# Altium PCB Antenna_base_v3.PcbDoc (part 1 of 2)
Units mil, origin at the board's own origin, x right, y up, seen from the top; angles counter-clockwise.
Board outline 2245 x 2630 mil, 2 copper layers (Top Layer, Bottom Layer); 85 components, 87 nets, 365 pads, 73 vias.
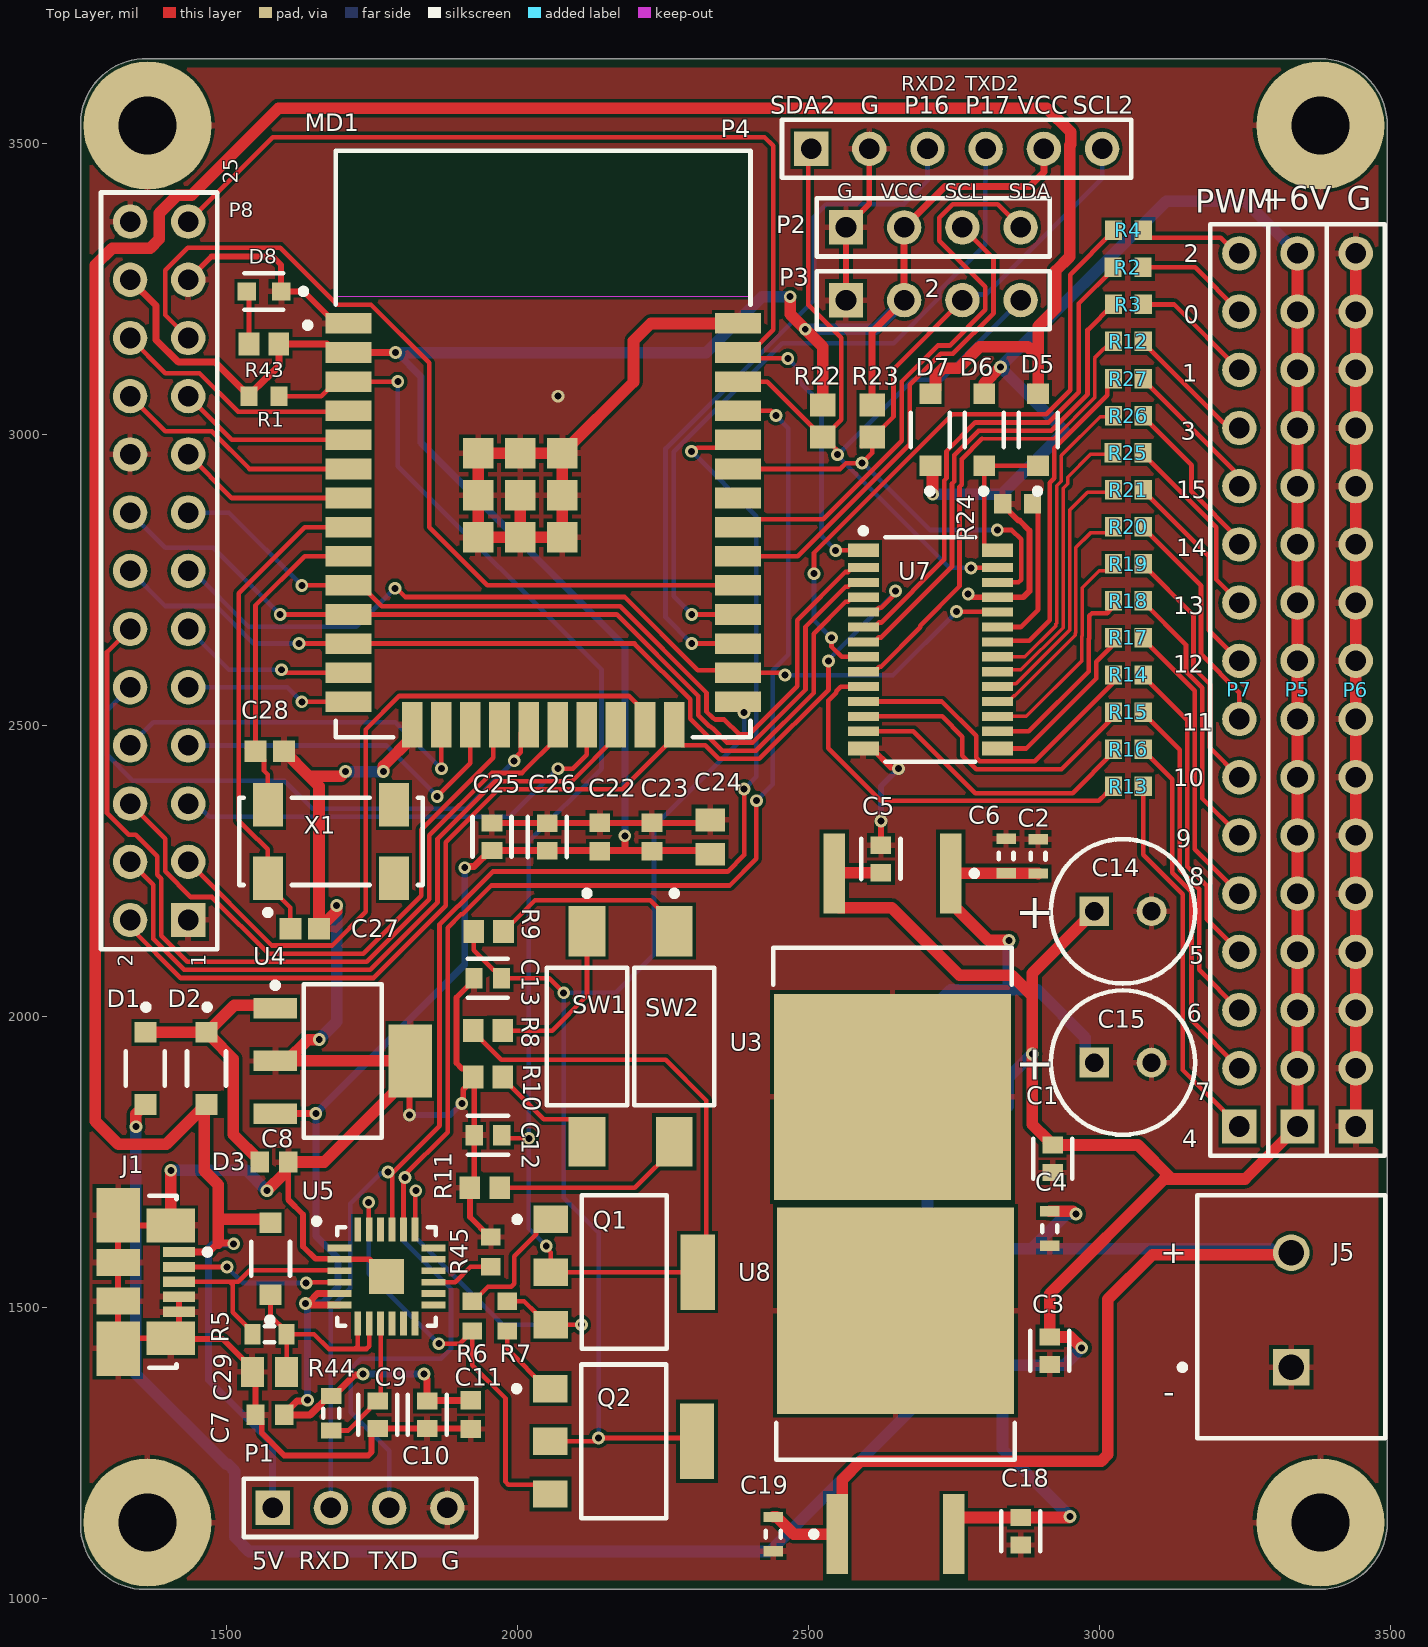
[diagram p0: Top Layer view]
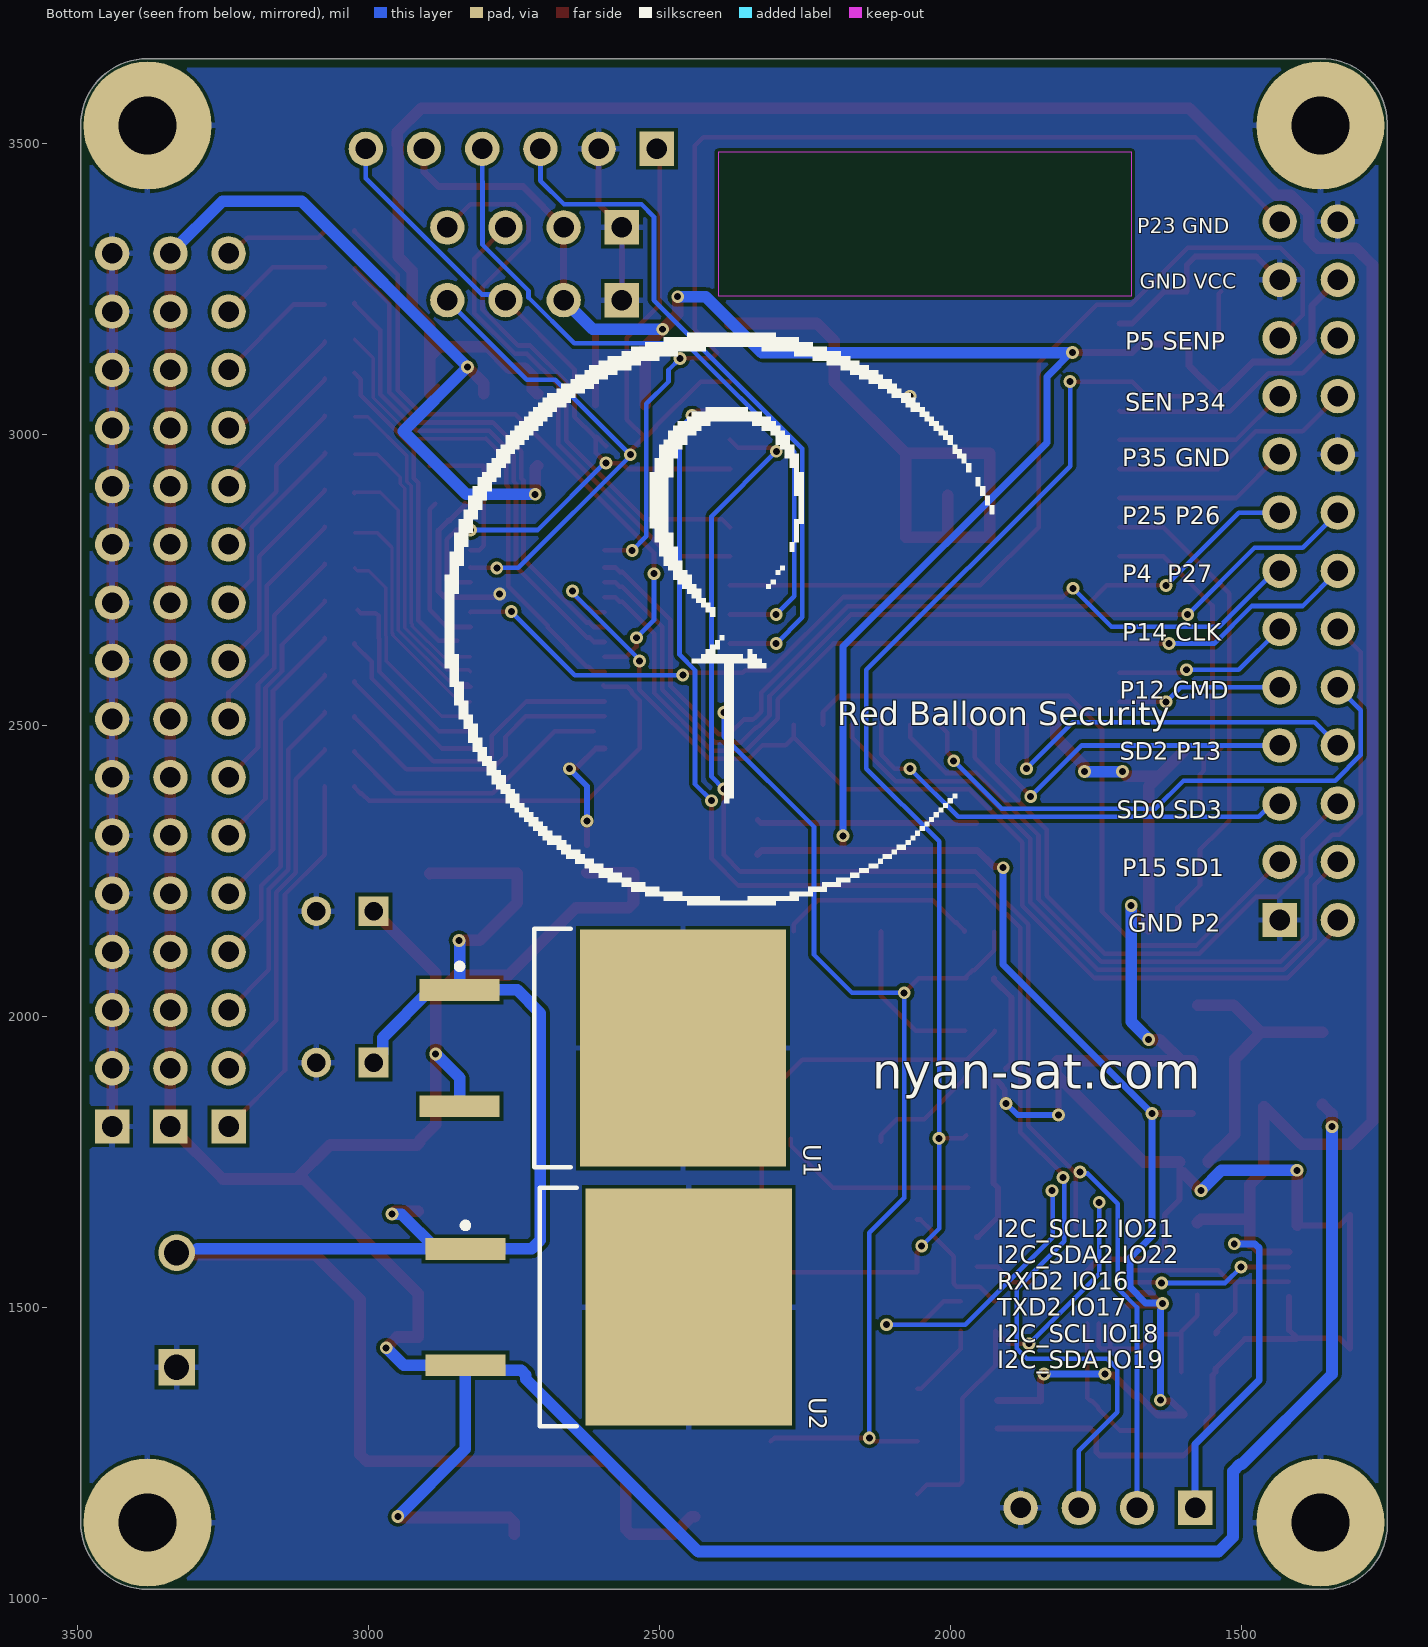
[diagram p1: Bottom Layer view, seen from below]
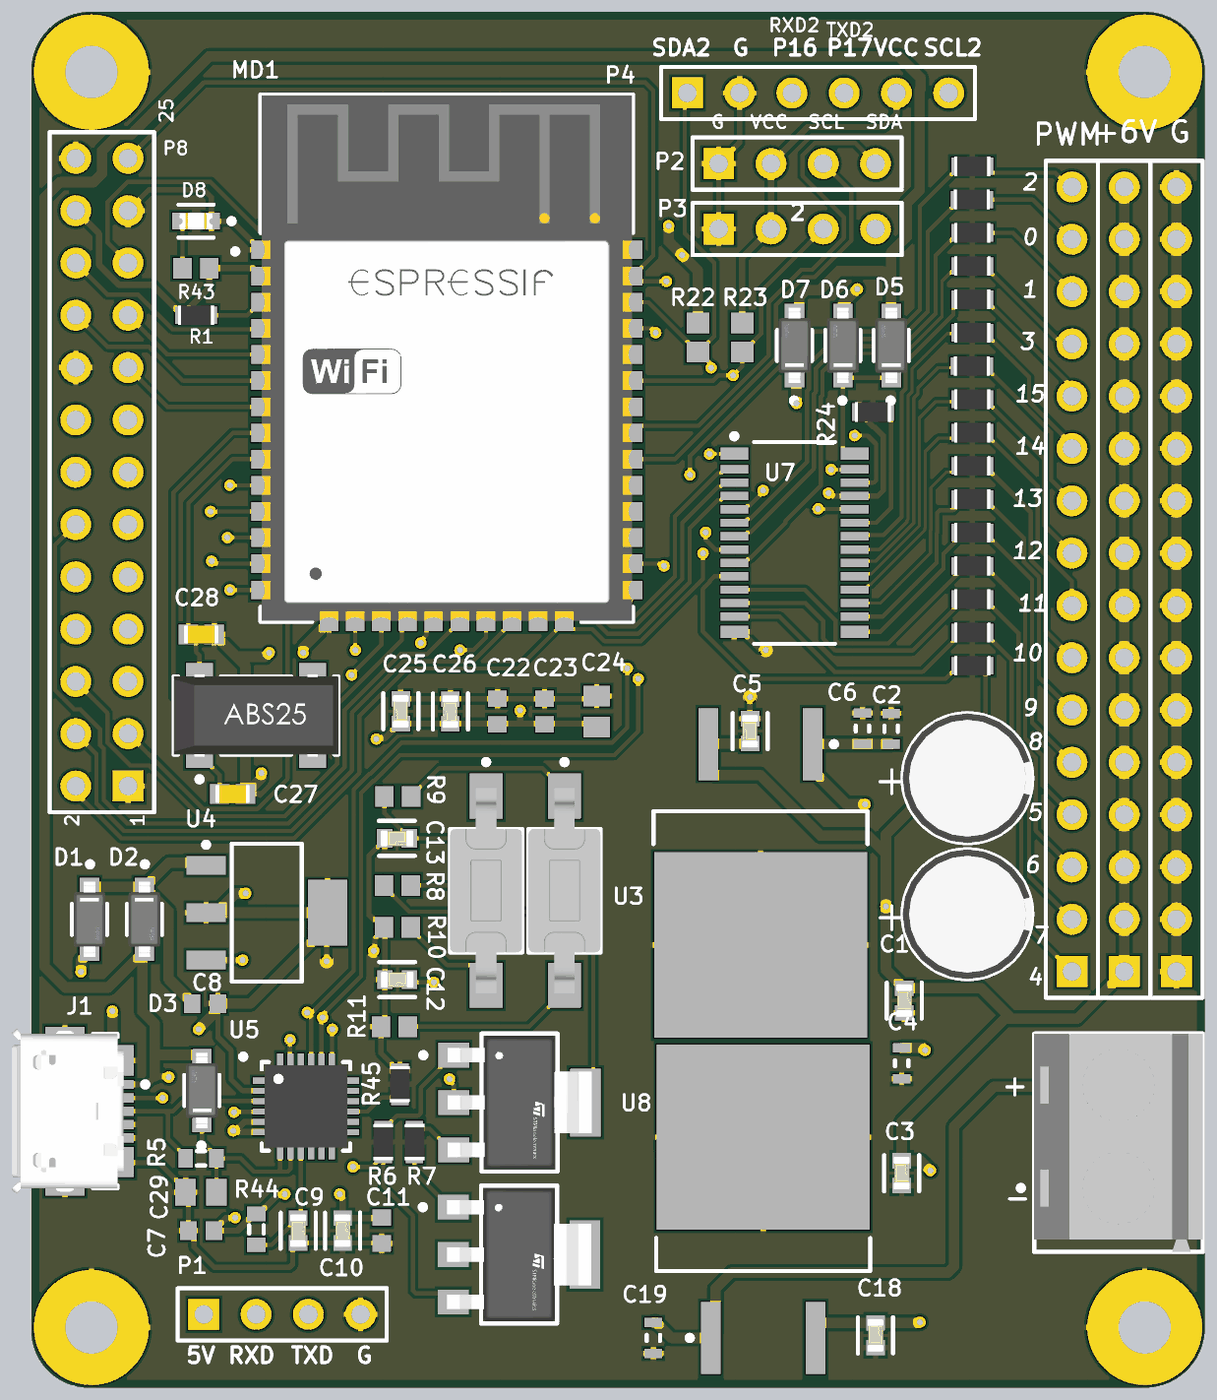
[diagram p3: 3D render of the assembled board from above, using the file's embedded part models]

## Layer stack, top to bottom
Top Solder: solder mask 0.4, Solder Resist, Dk 3.5
Top Layer: signal copper 1.4
Dielectric 1: dielectric 12.6, FR-4, Dk 4.8
Bottom Layer: signal copper 1.4
Bottom Solder: solder mask 0.4, Solder Resist, Dk 3.5

## Board outline
1250,1125 ccw(c1360,1125) 1360,1015 3380,1015 ccw(c3380,1130) 3495,1130 3495,3530 ccw(c3380,3530) 3380,3645 1365,3645 ccw(c1362.5,3532.5) 1250,3535

## Design rules (kind name [scope] priority, off if disabled: settings)
BoardOutlineClearance [All] p1: gap=15 ignorepadtopadclearanceinfootprint=FALSE
Clearance "Clearance Polygons" [InPolygon] p1: gap=6 ignorepadtopadclearanceinfootprint=FALSE except(0: Arc-Hole Track-Hole SMDPad-Hole THPad-Hole Via-Hole Fill-Hole Poly-Hole Region-Hole Text-Hole)
Clearance [All] p2: gap=5 ignorepadtopadclearanceinfootprint=FALSE except(0: Arc-Hole Track-Hole SMDPad-Hole THPad-Hole Via-Hole Fill-Hole Poly-Hole Region-Hole Text-Hole; 2: SMDPad-Via)
ComponentClearance "HM-TRP & UFL" [InComponent('X1') vs InComponent('U1')] p1: gap=0 collisioncheckmode=3 verticalgap=0 showdistances=FALSE
ComponentClearance [All] p2: gap=0 collisioncheckmode=3 verticalgap=0 showdistances=FALSE
DiffPairsRouting [All] p1: maxlimit=393.7 minlimit=5 mostfreqgap=8 toplayer_minwidth=5 toplayer_maxwidth=15 toplayer_prefwidth=8 bottomlayer_minwidth=5 bottomlayer_maxwidth=15 bottomlayer_prefwidth=8 maxuncoupledlength=500
HoleSize [All] p1: absolutevalues=TRUE maxlimit=265 minlimit=10 maxpercent=80.000 minpercent=20.000
HoleToHoleClearance [All] p1: gap=10 allowstackedmicrovias=FALSE
MinimumAnnularRing [All] p1: minimumring=4
MinimumSolderMaskSliver [All] p1: minsoldermaskwidth=0
PlaneClearance [All] p1: clearance=10
PlaneConnect [All] p1: planeconnectstyle=Relief reliefexpansion=4 reliefentries=4 reliefconductorwidth=6 reliefairgap=6
PolygonConnect "Via connect style" [isVia] p1: connectstyle=Direct reliefconductorwidth=10 reliefentries=4 polygonreliefangle="90 Angle" airgapwidth=10
PolygonConnect [All] p2: connectstyle=Relief reliefconductorwidth=10 reliefentries=4 polygonreliefangle="90 Angle" airgapwidth=6
RoutingCorners [All] p1: cornerstyle=45-Degree minsetback=49.21 maxsetback=49.21
RoutingVias [All] p1: holewidth=12 width=22 viastyle="Through Hole" minholewidth=10 minwidth=18 maxholewidth=100 maxwidth=114
SilkToSilkClearance [All] p1: silktosilkclearance=0
SilkToSolderMaskClearance [IsPad] p1: minsilkscreentomaskgap=5 clearancetoexposedcopper=TRUE
SolderMaskExpansion [All] p1: expansion=2.5 istentingtop=FALSE
Width GND [InNet('GND')] p1: maxlimit=30 minlimit=10 preferedwidth=20
Width Power [InNetClass('Power')] p2: maxlimit=40 minlimit=20 preferedwidth=30
Width 3V3 [InNetClass('3V3')] p3: maxlimit=30 minlimit=10 preferedwidth=20
Width [All] p4: maxlimit=400 minlimit=6 preferedwidth=8
20 further rules are at their usual default settings.

## Classes and differential pairs
component class 11_GPS_BREAKOUT: P4
component class 10_IMU_BREAKOUT: P2
component class 08_CoreBoard: C22 C23 C24 C25 C26 C27 C28 D8 MD1 P8 R1 R43 X1
component class 05_PWMdriver: D5 D6 D7 P3 P5 P6 P7 R2 R3 R4 R12 R13 R14 R15 R16 R17 R18 R19 R20 R21 R22 R23 R24 R25 R26 R27 U7
component class 03_pushswitch: C12 C13 Q1 Q2 R6 R7 R8 R9 R10 R11 SW1 SW2
component class 02_USB2UART: C7 C8 C9 C10 C11 C29 D1 D2 D3 J1 P1 R5 R44 R45 U4 U5
component class 01_powersupply: C1 C2 C3 C4 C5 C6 C14 C15 C18 C19 J5 U1 U2 U3 U8

## Components (designator, comment, footprint, x,y, rotation, side; value= is the part's Value field where it differs from the comment)
C1 "C0603_0.1UF" FP-C0603C-CF-MFG#1 2920,1755 r270 top value="0.10 μF"
C2 "C0603_0.33UF" CAPC1608X90X20LL10 2895,2274.53 r270 top value=0.33uF
C3 "C0603_0.1UF" FP-C0603C-CF-MFG#2 2915,1425 r270 top value="0.10 μF"
C4 "C0603_0.33UF" CAPC1608X90X20LL10 2915,1635 r90 top value=0.33uF
C5 "C0603_0.1UF" FP-C0603C-CF-MFG#1 2625,2270 r90 top value="0.10 μF"
C6 "C0603_0.33UF" CAPC1608X90X20LL10 2840,2275 r270 top value=0.33uF
C7 "C0603_1UF" CAPC1608X87X35LL15T15 1575,1315 r0 top value=1uF
C8 "C0603_1UF" CAPC1608X87X35LL15T15 1582.24,1749.21 r180 top value=1uF
C9 "C0603_0.1UF" FP-C0603C-CF-MFG#1 1760.47,1315.2 r270 top value="0.10 μF"
C10 "C0603_0.1UF" FP-C0603C-CF-MFG#2 1845.47,1315.2 r270 top value="0.10 μF"
C11 "C0603_1UF" CAPC1608X87X35LL15T15 1920.47,1315.2 r90 top value=1uF
C12 "C0603_0.1UF" FP-C0603C-CF-MFG#1 1950,1795 r180 top value="0.10 μF"
C13 "C0603_0.1UF" FP-C0603C-CF-MFG#1 1949.57,2065.04 r180 top value="0.10 μF"
C14 "ECA-2AM220" CAPPR55-250-1120X630X1220 3040.79,2180 r0 top
C15 "ECA-2AM220" CAPPR55-250-1120X630X1220 3040.79,1920 r0 top
C18 "C0603_0.1UF" FP-C0603C-CF-MFG#2 2865,1115 r270 top value="0.10 μF"
C19 "C0603_0.33UF" CAPC1608X90X20LL10 2440,1110 r90 top value=0.33uF
C22 "C0603_1UF" CAPC1608X87X35LL15T15 2141.73,2307.52 r270 top value=1uF
C23 "C0603_1UF" CAPC1608X87X35LL15T15 2231.73,2307.52 r270 top value=1uF
C24 "C0805_10UF" CAPC2013X135X50LL10T20 2331.73,2307.52 r270 top value=10uF
C25 "C0603_0.1UF" FP-C0603C-CF-MFG#1 1956.73,2308.11 r90 top value="0.10 μF"
C26 "C0603_0.1UF" FP-C0603C-CF-MFG#1 2051.73,2307.52 r90 top value="0.10 μF"
C27 "CC0603JRNPO9BN120" CAPC1608X90X40NL10T20 1635,2150 r180 top value=12pF
C28 "CC0603JRNPO9BN120" CAPC1608X90X40NL10T20 1575,2455 r180 top value=12pF
C29 "C0805_10UF" CAPC2013X135X50LL10T20 1574.57,1388.43 r0 top value=10uF
D1 "DIODE_1N5819" FP-SOD123-MFG 1361.3,1910.08 r270 top value=50pF
D2 "DIODE_1N5819" FP-SOD123-MFG 1466.3,1910.08 r270 top value=50pF
D3 "DIODE_1N5819" FP-SOD123-MFG 1576.3,1583.07 r90 top value=50pF
D5 "DIODE_1N5819" FP-SOD123-MFG 2895,3007.28 r90 top value=50pF
D6 "DIODE_1N5819" FP-SOD123-MFG 2802.5,3007.28 r90 top value=50pF
D7 "DIODE_1N5819" FP-SOD123-MFG 2710,3007.28 r90 top value=50pF
D8 "LED" FP-LTST-C190GKT-MFG 1565,3245 r180 top
J1 "47346-0001" MOLX-47346-0001-5_V 1322.24,1543.43 r270 top
J5 "282836-2" TECO-282836-2_V 3330,1495 r90 top
MD1 "ESP32-WROOM-32D" FP-ESP32-WROOM-32D-MFG 2044.65,2982.91 r0 top
P1 "Header 4" HDR1X4 1580,1155 r0 top
P2 "Header 4" HDR1X4 2565,3355 r0 top
P3 "Header 4" HDR1X4 2565,3230 r0 top
P4 "Header 6" HDR1X6 2505,3490 r0 top
P5 "Header 16" HDR1X16 3340.79,1810.35 r90 top
P6 "Header 16" HDR1X16 3440.79,1810.35 r90 top
P7 "Header 16" HDR1X16 3240.79,1810.35 r90 top
P8 "Header 13X2" HDR2X13 1435,2165 r90 top
Q1 "BCP56-16" FP-SOT-223-P008-MFG#1 2184.02,1560 r0 top
Q2 "BCP56-16" FP-SOT-223-P008-MFG#2 2183.03,1269.45 r0 top
R1 "R0603_10K" RESC1609X55X30LL15T15 1565,3065 r0 top value=10k
R2 "R0603_10K" RESC1609X55X30LL15T15 3049.41,3286.33 r0 top value=10k
R3 "R0603_10K" RESC1609X55X30LL15T15 3050,3222.67 r0 top value=10k
R4 "R0603_10K" RESC1609X55X30LL15T15 3050,3350 r0 top value=10k
R5 "R0603_4.7K" J1-0603 1574.57,1453.43 r180 top value=4.7K
R6 "R0603_10K" RESC1609X55X30LL15T15 1923.03,1484.45 r90 top value=10k
R7 "R0603_10K" RESC1609X55X30LL15T15 1983.03,1484.45 r270 top value=10k
R8 "R0603_120R" RESC1608X55X30NL20T20 1950,1975 r180 top value=120ohm
R9 "R0603_120R" RESC1608X55X30NL20T20 1950.94,2145.04 r180 top value=120ohm
R10 "R0603_120R" RESC1608X55X30NL20T20 1950,1895 r0 top value=120ohm
R11 "R0603_120R" RESC1608X55X30NL20T20 1944.41,1705 r0 top value=120ohm
R12 "R0603_10K" RESC1609X55X30LL15T15 3050,3159 r0 top value=10k
R13 "R0603_10K" RESC1609X55X30LL15T15 3050,2395 r0 top value=10k
R14 "R0603_10K" RESC1609X55X30LL15T15 3050,2586 r0 top value=10k
R15 "R0603_10K" RESC1609X55X30LL15T15 3050,2522.33 r0 top value=10k
R16 "R0603_10K" RESC1609X55X30LL15T15 3050,2458.67 r0 top value=10k
R17 "R0603_10K" RESC1609X55X30LL15T15 3050,2649.67 r0 top value=10k
R18 "R0603_10K" RESC1609X55X30LL15T15 3050,2713.33 r0 top value=10k
R19 "R0603_10K" RESC1609X55X30LL15T15 3050,2777 r0 top value=10k
R20 "R0603_10K" RESC1609X55X30LL15T15 3050,2840.67 r0 top value=10k
R21 "R0603_10K" RESC1609X55X30LL15T15 3050,2904.33 r0 top value=10k
R22 "R0603_2.4K" RESC1608X50X30ML20T20 2525,3022.56 r90 top value=2.4kR
R23 "R0603_2.4K" RESC1608X50X30ML20T20 2610,3022.56 r90 top value=2.4kR
R24 "R0603_10K" RESC1609X55X30LL15T15 2860,2880 r180 top value=10k
R25 "R0603_10K" RESC1609X55X30LL15T15 3049.41,2968 r0 top value=10k
R26 "R0603_10K" RESC1609X55X30LL15T15 3050,3031.67 r0 top value=10k
R27 "R0603_10K" RESC1609X55X30LL15T15 3050,3095.33 r0 top value=10k
R43 "R0603_120R" RESC1608X55X30NL20T20 1565,3155 r180 top value=120ohm
R44 "R0603_4.7K" J1-0603 1680.47,1317.48 r90 top value=4.7K
R45 "R0603_10K" RESC1609X55X30LL15T15 1955,1595 r90 top value=10k
SW1 "push_button" TECO-FSMSMTR_V 2120,1965 r270 top
SW2 "push_button" TECO-FSMSMTR_V 2270,1965 r270 top
U1 "L7806CD2T-TR" TO-263_L 2597.8,1945 r180 bottom
U2 "L7806CD2T-TR" TO-263_L 2587.8,1500 r180 bottom
U3 "L7806CD2T-TR" TO-263_L 2645,1998.94 r270 top
U4 "MCP1826S-3302E/DB" SOT-223-DB3_L 1700.47,1922.95 r0 top
U5 "CP2102N-A01-GQFN24" SLAB-QFN-24-2550x2550TP_A_V 1775.34,1552.64 r0 top
U7 "PCA9685PW" SOT361-1_V 2710,2630 r0 top
U8 "L7806CD2T-TR" TO-263_L 2650,1356.06 r90 top
X1 "ABS25-32.768KHZ-1-T" ABRA-ABS25-4_V 1680,2300 r0 top

## Footprints (in the part's own frame and the unit in brackets; to place one, negate y for a bottom-side part, rotate by r counter-clockwise, add the part's x,y. Pads: shape width x height; smd on the part's side, far side on the other; paste and mask are expansions set on the pad)
ABRA-ABS25-4_V [mm] "SMD, 4-Leads, Body 8x3.8mm, Pitch 5.5mm, Height 2.5mm"
  rect 1.3x1.9 smd: 1(-2.75,-1.6) 2(2.75,-1.6) 3(2.75,1.6) 4(-2.75,1.6)
  silkscreen extent -4,-3.22 4,1.9, body extent -4,-2 4,2, height 2.66
CAPC1608X87X35LL15T15 [mm] "Chip Capacitor, 2-Leads, Body 1.60x0.80mm, IPC High Density"
  rect 0.8x0.9 smd: 1(-0.625,0) 2(0.625,0)
  body extent -0.87,-0.48 0.87,0.48, height 0.87
CAPC1608X90X20LL10 [mm] "Chip Capacitor, 2-Leads, Body 1.70x0.90mm, IPC High Density"
  rect 0.45x0.85 smd: 1(-0.75,0) 2(0.75,0)
  silkscreen extent -0.15,-0.33 0.15,0.33, body extent -0.85,-0.45 0.85,0.45, height 0.9
CAPC1608X90X40NL10T20 [mm] "Chip Capacitor, 2-Leads, Body 1.7x0.9mm, IPC Medium Density"
  rect 0.95x0.95 smd: 1(-0.625,0) 2(0.625,0)
  body extent -0.85,-0.45 0.85,0.45, height 0.9
CAPC2013X135X50LL10T20 [mm] "Chip Capacitor, 2-Leads, Body 2.00x1.25mm, IPC High Density"
  rect 1x1.3 smd: 1(-0.75,0) 2(0.75,0)
  body extent -1.05,-0.67 1.05,0.68, height 1.35
CAPPR55-250-1120X630X1220 [mm] "THD, 2-Leads, Dia 6.3mm, Body Length 11.2mm"
  rect 1.3x1.3 hole 0.8: 1(-1.25,0)
  round 1.3 hole 0.8: 2(1.25,0)
  silkscreen extent -3.15,-3.15 3.15,3.15, body extent -3.15,-3.15 3.16,3.15, height 12.21
FP-C0603C-CF-MFG#1 [mm]
  rect 0.75x0.9 smd: 1(-0.6,0) 2(0.6,0)
  silkscreen extent -0.87,-0.85 0.88,0.85, body extent -0.8,-0.4 0.8,0.4, height 0.87
FP-C0603C-CF-MFG#2 [mm]
  rect 0.75x0.9 smd paste+0 mask+0: 1(-0.6,0) 2(0.6,0)
  silkscreen extent -0.87,-0.85 0.88,0.85, body extent -0.8,-0.4 0.8,0.4, height 0.87
FP-ESP32-WROOM-32D-MFG [mm]
  rect 2x0.9 smd: 1(-8.5,5.26) 2(-8.5,3.99) 3(-8.5,2.72) 4(-8.5,1.45) 5(-8.5,0.18) 6(-8.5,-1.09) 7(-8.5,-2.36) 8(-8.5,-3.63) 9(-8.5,-4.9) 10(-8.5,-6.17) 11(-8.5,-7.44) 12(-8.5,-8.71) 13(-8.5,-9.98) 14(-8.5,-11.25) 25(8.5,-11.25) 26(8.5,-9.98) 27(8.5,-8.71) 28(8.5,-7.44) 29(8.5,-6.17) 30(8.5,-4.9) 31(8.5,-3.63) 32(8.5,-2.36) 33(8.5,-1.09) 34(8.5,0.18) 35(8.5,1.45) 36(8.5,2.72) 37(8.5,3.99) 38(8.5,5.26)
  rect 0.9x2 smd: 15(-5.715,-12.25) 16(-4.445,-12.25) 17(-3.175,-12.25) 18(-1.905,-12.25) 19(-0.635,-12.25) 20(0.635,-12.25) 21(1.905,-12.25) 22(3.175,-12.25) 23(4.445,-12.25) 24(5.715,-12.25)
  rect 1.33x1.33 smd: 39(-2.835,-4.075) 39(-2.835,-2.24) 39(-2.835,-0.405) 39(-1,-4.075) 39(-1,-2.24) 39(-1,-0.405) 39(0.835,-4.075) 39(0.835,-2.24) 39(0.835,-0.405)
  Keep-Out Layer region: -9,6.45 9,6.45 9,12.75 -9,12.75
  Keep-Out Layer region: -9,6.45 9,6.45 9,12.75 -9,12.75
  silkscreen extent -10.4,-12.8 9.05,12.8, body extent -9.6,-13.35 9.6,12.9, height 0.25
FP-LTST-C190GKT-MFG [mm]
  rect 0.8x0.8 smd: 1(-0.75,0) 2(0.75,0)
  silkscreen extent -1.85,-0.8 0.85,0.8, body extent -1.25,-0.55 1.25,0.55, height 0.25
FP-SOD123-MFG [mm]
  rect 0.9x0.95 smd: 1(-1.575,0) 2(1.575,0)
  silkscreen extent -2.8,-0.85 0.75,0.85, body extent -2.12,-0.95 2.12,0.95, height 0.25
FP-SOT-223-P008-MFG#1 [mm]
  rect 1.5x1.2 smd: 1(-3.2,2.3) 2(-3.2,0) 3(-3.2,-2.3)
  rect 1.5x3.3 smd: 2(3.2,0)
  silkscreen extent -4.8,-3.35 1.85,3.35, body extent -4.05,-3.45 4.05,3.45, height 0.25
FP-SOT-223-P008-MFG#2 [mm]
  rect 1.5x1.2 smd paste+0 mask+0: 1(-3.2,2.3) 2(-3.2,0) 3(-3.2,-2.3)
  rect 1.5x3.3 smd paste+0 mask+0: 2(3.2,0)
  silkscreen extent -4.8,-3.35 1.85,3.35, body extent -4.05,-3.45 4.05,3.45, height 0.25
HDR1X4 [mm] "Connector; Header; 4 Position"
  rect 1.5x1.5 hole 0.9: 1(0,0)
  round 1.5 hole 0.9: 2(2.54,0) 3(5.08,0) 4(7.62,0)
  silkscreen extent -1.27,-1.27 8.89,1.27
HDR1X6 [mm] "Connector; Header; 6 Position"
  rect 1.5x1.5 hole 0.9: 1(0,0)
  round 1.5 hole 0.9: 2(2.54,0) 3(5.08,0) 4(7.62,0) 5(10.16,0) 6(12.7,0)
  silkscreen extent -1.27,-1.27 13.97,1.27
HDR1X16 [mm] "Connector; Header; 16 Position"
  rect 1.5x1.5 hole 0.9: 1(0,0)
  round 1.5 hole 0.9: 2(2.54,0) 3(5.08,0) 4(7.62,0) 5(10.16,0) 6(12.7,0) 7(15.24,0) 8(17.78,0) 9(20.32,0) 10(22.86,0) 11(25.4,0) 12(27.94,0) 13(30.48,0) 14(33.02,0) 15(35.56,0) 16(38.1,0)
  silkscreen extent -1.27,-1.27 39.37,1.27
HDR2X13 [mm] "Connector; Header; 13x2 Position"
  rect 1.5x1.5 hole 0.9: 1(0,0)
  round 1.5 hole 0.9: 2(0,2.54) 3(2.54,0) 4(2.54,2.54) 5(5.08,0) 6(5.08,2.54) 7(7.62,0) 8(7.62,2.54) 9(10.16,0) 10(10.16,2.54) 11(12.7,0) 12(12.7,2.54) 13(15.24,0) 14(15.24,2.54) 15(17.78,0) 16(17.78,2.54) 17(20.32,0) 18(20.32,2.54) 19(22.86,0) 20(22.86,2.54) 21(25.4,0) 22(25.4,2.54) 23(27.94,0) 24(27.94,2.54) 25(30.48,0) 26(30.48,2.54)
  silkscreen extent -1.27,-1.27 31.75,3.81
J1-0603 [mm] "Chip Resistor, Body 1.6x0.8mm, IPC High Density"
  rect 0.7x0.9 smd: 1(-0.75,0) 2(0.75,0)
  silkscreen extent -0.2,-0.35 0.2,0.35, body extent -0.85,-0.48 0.85,0.48, height 0.9
MOLX-47346-0001-5_V [mm] "SMD, 5-Leads, Body 7.5x5mm, Pitch 0.65mm"
  rect 0.45x1.38 smd: 1(-1.3,2.46) 2(-0.65,2.46) 3(0,2.46) 4(0.65,2.46) 5(1.3,2.46)
  rect 1.475x2.1 smd: 6(-2.462,2.1) 7(2.462,2.1)
  rect 2.375x1.9 smd: 8(-2.913,-0.2) 11(2.913,-0.2)
  rect 1.175x1.9 smd: 9(-0.837,-0.2) 10(0.837,-0.2)
  silkscreen extent -3.75,1.16 3.75,3.83, body extent -3.99,-2.78 3.99,2.65, height 2.69
RESC1608X50X30ML20T20 [mm] "Chip Resistor, 2-Leads, Body 1.60x0.80mm, IPC Low Density"
  rect 1x1.1 smd: 1(-0.7,0) 2(0.7,0)
  body extent -0.9,-0.5 0.9,0.5, height 0.5
RESC1608X55X30NL20T20 [mm] "Chip Resistor, 2-Leads, Body 1.60x0.80mm, IPC Medium Density"
  rect 0.9x1 smd: 1(-0.65,0) 2(0.65,0)
  body extent -0.9,-0.5 0.9,0.5, height 0.55
RESC1609X55X30LL15T15 [mm] "Chip Resistor, 2-Leads, Body 1.75x0.95mm, IPC High Density"
  rect 0.75x0.85 smd: 1(-0.65,0) 2(0.65,0)
  body extent -0.87,-0.48 0.87,0.48, height 0.55
SLAB-QFN-24-2550x2550TP_A_V [mm] "QFN, 6-Leads, Body 4x4mm, Pitch 0.5mm, Thermal Pad 2.55x2.55mm"
  rect 1.053x0.3 smd: 1(-2.052,1.25) 2(-2.052,0.75) 3(-2.052,0.25) 4(-2.052,-0.25) 5(-2.052,-0.75) 6(-2.052,-1.25) 13(2.052,-1.25) 14(2.052,-0.75) 15(2.052,-0.25) 16(2.052,0.25) 17(2.052,0.75) 18(2.052,1.25)
  rect 0.3x1.053 smd: 7(-1.25,-2.052) 8(-0.75,-2.052) 9(-0.25,-2.052) 10(0.25,-2.052) 11(0.75,-2.052) 12(1.25,-2.052) 19(1.25,2.052) 20(0.75,2.052) 21(0.25,2.052) 22(-0.25,2.052) 23(-0.75,2.052) 24(-1.25,2.052)
  rect 1.524x1.524 smd: 25(0,0)
  silkscreen extent -3.17,-2.15 2.15,2.54, body extent -2,-2 2,2, height 0.8
SOT361-1_V [mm] "SOP, 28-Leads, Body 9.7x4.4mm, Pitch 0.65mm, NXP Recommended"
  rect 1.35x0.6 smd: 1(-2.925,4.325) 14(-2.925,-4.325) 15(2.925,-4.325) 28(2.925,4.325)
  rect 1.35x0.4 smd: 2(-2.925,3.575) 3(-2.925,2.925) 4(-2.925,2.275) 5(-2.925,1.625) 6(-2.925,0.975) 7(-2.925,0.325) 8(-2.925,-0.325) 9(-2.925,-0.975) 10(-2.925,-1.625) 11(-2.925,-2.275) 12(-2.925,-2.925) 13(-2.925,-3.575) 16(2.925,-3.575) 17(2.925,-2.925) 18(2.925,-2.275) 19(2.925,-1.625) 20(2.925,-0.975) 21(2.925,-0.325) 22(2.925,0.325) 23(2.925,0.975) 24(2.925,1.625) 25(2.925,2.275) 26(2.925,2.925) 27(2.925,3.575)
  silkscreen extent -3.05,-4.9 1.96,5.3, body extent -2.2,-4.85 2.2,4.85, height 1.1
SOT-223-DB3_L [mm] "SOT223, 4-Leads, Body 6.5x3.5mm, Pitch 2.3mm, Lead Span 7mm, IPC High Density"
  rect 1.9x0.9 smd: 1(-2.95,2.3) 2(-2.95,0) 3(-2.95,-2.3)
  rect 1.9x3.2 smd: 4(2.95,0)
  silkscreen extent -3.07,-3.35 1.7,3.42, body extent -1.85,-3.35 1.85,3.35, height 1.8
TECO-282836-2_V [mm] "Female Header, Pitch 5mm, 1 x 2 Position, Height 10mm"
  rect 1.6x1.6 hole 1.1: 1(-2.5,0)
  round 1.6 hole 1.1: 2(2.5,0)
  silkscreen extent -5.6,-4.1 5,4.87, body extent -5.6,-4.1 5,4.1, height 10
TECO-FSMSMTR_V [mm] "SMD, 2-Leads, Body 6x3.5mm, Pitch 9.19mm"
  rect 2.2x1.6 smd: 1(-4.595,0)
  rect 2.18x1.6 smd: 2(4.595,0)
  silkscreen extent -6.37,-1.75 3,1.75, body extent -4.98,-1.75 4.98,1.75, height 4.4
TO-263_L [mm] "D2-PAK, 4-Leads, Body 9.2x10.2mm, Pitch 2.54mm, Lead Span 15.4mm, IPC High Density"
  rect 3.5x0.95 smd: 1(-6.25,2.54) 3(-6.25,-2.54)
  rect 9x10.35 smd: 4(3.5,0)
  silkscreen extent -6.38,-5.2 -1.4,5.2, body extent -3,-5.2 6.35,5.2, height 4.6

## Part data
C1 C3 C5 C9 C10 C12 C13 C18 C25 C26: library part CMP-03020-016578-1, "CAP CER 0.1UF 16V X7R 0603", Capacitance="0.10 μF", Manufacturer=KEMET, Manufacturer Part Number=C0603C104M4RAC7411, Package=C0603C-CF, Temperature="-55°C to +125°C", Temperature Characteristic=X7R, Temperature Coefficient=30ppm/°C, Temperature Range High=+125°C, Temperature Range Low=-55°C, Tolerance=0.2, Voltage Rating="16 V", Automotive=Yes, Automotive Grade="Grade 1", Category=Cap, ComponentLink2Description=Datasheet, ComponentLink2URL=https://api.kemet.com/component-edge/download/datasheet/C0603C100J5GACAUTO.pdf, Device Class L1="Passive Components", Device Class L2=Capacitors, Device Class L3="Ceramic Capacitors", Digikey Description="CAP CER 0.1UF 16V X7R 0603", Height=0.87mm, Lead Free=Yes, Material=Ceramic, Mouser Description="Multilayer Ceramic Capacitors MLCC - SMD/SMT 16volts 0.1uF X7R 20%", Octopart=https://octopart.com/c0603c104m4rac7411-kemet-9138805, RoHS=TRUE
C2 C4 C6 C19: library part CMP-2000-07551-1, "Chip Capacitor, 0.33 uF, +/- 10%, 50 V, -55 to 125 degC, 0603 (1608 Metric), RoHS, Tape and Reel", Manufacturer=TDK, Package Description="2-Pin Surface Mount Device, Body 1.6 x 0.8 mm", Package Reference=603, Datasheet URL=https://product.tdk.com/info/en/catalog/datasheets/mlcc_commercial_general_en.pdf, Datasheet Version=07/2017, Manufacturer URL=http://www.tdk.com/, Mounting Technology=SurfaceMount
C7 C8 C11 C22 C23: library part CMP-2006-03318-1, Manufacturer=Kemet, Part Number=C0603C101J1GACTU
C14 C15: library part CMP-1665-00035-2, "Aluminum Electrolytic Capacitor, 22 uF, +/- 20%, 100 V, -40 to 85 degC, 2-Pin THD, RoHS, Bulk", Case Code (Imperial)=0603, Case Code (Metric)=1608, Colour=Orange, Forward Current="20 mA", Forward Voltage="2.1 V", Max Operating Temperature="85 degC", Min Operating Temperature="-55 degC", Package Quantity=3000, Case\Package=0603, ComponentLink1Description="Manufacturer URL", ComponentLink1URL=http://www.panasonic.com/, ComponentLink2Description=Datasheet, ComponentLink2URL=https://industrial.panasonic.com/cdbs/www-data/pdf/RDF0000/ABA0000C1047.pdf, DatasheetVersion=Mar-16, Height="1.1 mm", Illumination Colour=Orange, Length="1.6 mm", Lens Style=Clear, Luminous Intensity="2 mcd", Mount="Surface Mount", Nominal Vf="2.1 V", PackageDescription="2-Pin Through Hole Device, Dia 6.3 mm, Body Length 11.2 mm", PackageReference=Radial, Packaging="Tape and Reel", Pins=2, Radiation Hardening=No, RoHSCompliant=true, Viewing Angle="130 degrees", Width="0.8 mm"
C24 C29: library part CMP-2007-03453-1, Manufacturer=Murata, Package=0805, Part Number=GRM21BR61C106KE15L
C27 C28: library part CMP-1659-00031-1, "Chip Capacitor, 12 pF, +/- 5%, 50 V, -55 to 125 degC, 0603 (1608 Metric), RoHS, Tape and Reel", Case\Package=Axial, Max Operating Temperature="155 degC", Min Operating Temperature="-55 degC", Package Quantity=200, Power Rating="250 mW", Resistance="475 kohm", Tolerance=1%, Voltage Rating="250 V", ComponentLink1Description="Manufacturer URL", ComponentLink1URL=http://www.yageo.com/, ComponentLink2Description=Datasheet, ComponentLink2URL=http://www.yageo.com/NewPortal/yageodocoutput?fileName=/pdf/MLCC/UPY-GP_NP0_16V-to-50V_14.pdf, DatasheetVersion="Rev. 14, 07/2016", Length="0.248 inch", Mount="Through Hole", PackageDescription="2-Pin Surface Mount Device, Body 1.6 x 0.8 mm", PackageReference=0603, Packaging=Bulk, RoHSCompliant=true
D1 D2 D3 D5 D6 D7: library part CMP-12790-000018-1, "DIODE SCHOTTKY 40V 1A SOD123", Capacitance=50pF, Forward Current=1A, Manufacturer="Diodes Inc", Manufacturer Part Number=1N5819HW-7-F, Max Junction Temp=+125°C, Max Repetitive Reverse Voltage=40V, Max Surge Forward Current=25A, Package=SOD123, Peak Reverse Current=1mA, Temperature="-65°C to +125°C", Temperature Range Low=-65°C, Terminal Temperature Tt Degc=90, Automotive=No, Category=Diode, Ciiva Ids=815630, ComponentLink2Description=Datasheet, ComponentLink2URL=https://www.diodes.com/assets/Datasheets/ds30217.pdf, Device Class L1="Discrete Semiconductors", Device Class L2=Diodes, Device Class L3="Schottky Diodes", Digikey Description="DIODE SCHOTTKY 40V 1A SOD123", Footprint Url=https://www.diodes.com/assets/Package-Files/SOD123.pdf, Height=1.45mm, If A=1, Import Ts=1521843113, Ipc Land Pattern Name=SOD365155X123-2, Lead Free=Yes, Mouser Description="1N5819HW Series 40 V 1 A Surface Mount Schottky Barrier Rectifier - SOD-123", Octopart=https://octopart.com/1n5819hw-7-f-diodes+inc.-323197, Release Date=1385348939, Reverse Voltage=40V, RoHS=TRUE, Standoff Height=0mm, Temperature Range High=+125°C, Vr V=40
D8: library part CMP-22017-000005-1, "LED GREEN CLEAR CHIP SMD", Case Code (Imperial)=0603, Case Code (Metric)=1608, Color=Green, Forward Current=30mA, Forward Voltage=2.1V, Lens Color=Colorless, Max Operating Temperature=85°C, Min Operating Temperature=-55°C, Package Quantity=1, Power Dissipation=100mW, Reverse Voltage=5V, Test Current=10mA, Voltage=2V, Case/Package=0603, Depth=0.8mm, Dominant Wavelength=569nm, Height=0.8mm, Illumination Color=Green, Lead Free="Lead Free", Length=1.6mm, Lens Style=Clear, Lens Transparency=Clear, Luminous Intensity=6mcd, Mount="Surface Mount", Number of Elements=1, Number of LEDs=1, Number of Pins=2, Packaging="Tape and Reel", Power Rating=100mW, Radiation Hardening=No, Viewing Angle=130°, Wavelength=565nm, Width=0.8mm
J1: library part CMP-2000-05246-1, "Micro-USB B Receptacle with Flange, -30 to 85 degC, 5-Pin SMD, RoHS, Tape and Reel", Color=Black, Manufacturer=Molex, Maximum Current Rating=1.8/ContactA, Maximum Voltage Rating=30VAC, Operating Temperature=-30to85C, Body Orientation=RightAngle, Contact Material=CopperAlloy, Contact Plating=GoldOverPalladiumNickelOverNickel, Datasheet URL=https://datasheet.ciiva.com/30075/304740473460001-io-nectors-30075527.pdf, Datasheet Version=Dec-13, Dimension=7.8x5.43x2.94mm, Gender=RCP, Housing Material=LiquidCrystalPolymer, Manufacturer URL=http://www.molex.com/, Mounting=SurfaceMount, Number of Contacts=5, Number of Ports=1, Number of Terminals=5, Packaging=EmbossedTapeandReel, Part No=47346-0001, Pitch=0.65mm, RoHS=Yes, Termination Method=Solder, Type=MicroUSBTypeB
J5: library part CMP-1684-00017-1, "Female Header, Pitch 5 mm, 1 x 2 Position, Height 10 mm, Tail Length 3.5 mm, Rohs, Bulk", Color=Green, Current=13.5A, Manufacturer="TE Connectivity", Package Description="Female Header, Pitch 5 mm, 1 x 2 Position, Height 10 mm, Tail Length 3.5 mm", Package Reference=THD, Standard Package=300, Voltage=300V, 3D Model=282836-2.pdf, Category=Connectors,Interconnects, Clamp Material - Plating=Brass-NickelPlated, Contact Material - Plating=Brass-TinPlated, Datasheet URL=http://www.te.com.cn/commerce/DocumentDelivery/DDEController?Action=showdoc&DocId=Catalog+Section%7F1308389_EUROSTYLE_TERMINAL_BLOCKS%7F0607%7Fpdf%7FEnglish%7FENG_CS_1308389_EUROSTYLE_TERMINAL_BLOCKS_0607.pdf%7F282836-2, Dynamic Catalog=BuchananSeries, Family=TerminalBlocks-WiretoBoard, Featured Product=EurostyleTerminalBlockConnectors, Features=Interlocking(Side), Housing Material=Polyamide(PA66),Nylon6/6, Manufacturer URL=http://www.te.com, Mating Orientation=HorizontalwithBoard, Mounting Type=ThroughHole, Number of Levels=1, Other Names="5ULV-02B / A98076", Packaging=Bulk, Pitch="0.197\"(5.00mm)", Positions Per Level=2, Product Training Modules=Wire-to-BoardEurostyleTerminalBlocks, RoHS Information=282836-2StatementofCompliance, Screw Material - Plating=Brass-NickelPlated, Screw Thread=M3, Series=Buchanan, Torque - Screw=0.68Nm(6Lb-In), Wire Gauge=16-30AWG, Wire Termination=Screw-RisingCageClamp
MD1: library part CMP-194065-000003-1, "WIFI MODULE 32MBITS SPI FLASH", Manufacturer="Espressif Systems", Max Frequency=2484MHz, Max Supply Voltage=3.6V, Min Supply Voltage=3V, Nominal Supply Current=500mA, Temperature="-40°C to +85°C", Temperature Range High=+85°C, Temperature Range Low=-40°C, Automotive=No, Bandwidth=72MHz, Category=UNK, ComponentLink2Description=Datasheet, ComponentLink2URL=https://www.espressif.com/sites/default/files/documentation/esp32-wroom-32d_esp32-wroom-32u_datasheet_en.pdf, Data Rate=150Mbits/s, Device Class L1="Integrated Circuits (ICs)", Device Class L2="RF Semiconductors and Devices", Device Class L3=Transceivers, Digikey Description="WIFI MODULE 32MBITS SPI FLASH", Height=3.2mm, Interface=I2C,SPI,UART,Ethernet,I2S,Other, Lead Free=Yes, Manufacturer Part Number=ESP32-WROOM-32D, Mouser Description="Wi-Fi/BT BLE Module ESP32-D0WD, SPI Flash, UART, P", Number Of Adc Channels=16, Number Of Gpio=32, Octopart=https://octopart.com/esp32-wroom-32d-espressif+systems-91040050, Package=ESP32-WROOM-32D, RoHS=TRUE, Sensitivity=-98dBm
P1 P2 P3: "Header, 4-Pin", LatestRevisionDate=17-Jul-2002, LatestRevisionNote="Re-released for DXP Platform.", Publisher="Altium Limited"
P4: "Header, 6-Pin", LatestRevisionDate=17-Jul-2002, LatestRevisionNote="Re-released for DXP Platform.", Publisher="Altium Limited"
P5 P6 P7: "Header, 16-Pin", LatestRevisionDate=17-Jul-2002, LatestRevisionNote="Re-released for DXP Platform.", Publisher="Altium Limited"
P8: "Header, 13-Pin, Dual row", LatestRevisionDate=17-Jul-2002, LatestRevisionNote="Re-released for DXP Platform.", Publisher="Altium Limited"
Q1 Q2: library part CMP-12195-000003-1, "TRANS NPN 80V 1A SOT-223", Collector Base Voltage=100V, Collector Emitter Breakdown Voltage=80V, Collector Emitter Saturation Voltage=0.5V, Emitter Base Voltage=5V, Manufacturer=STMicroelectronics, Max Collector Current=1A, Max Junction Temp=+150°C, Package=SOT-223-P008, Power Dissipation=1.6W, Temperature="to +150°C", Automotive=No, Category=Trans, Collector Emitter Voltage=80V, ComponentLink2Description=Datasheet, ComponentLink2URL=https://www.st.com/resource/en/datasheet/bcp56-16.pdf, Device Class L1="Discrete Semiconductors", Device Class L2=Transistors, Device Class L3=BJTs, Digikey Description="TRANS NPN 80V 1A SOT-223", Footprint Url=https://www.st.com/content/ccc/resource/technical/document/application_note/45/cc/69/ea/2f/8d/4e/3c/CD00004438.pdf/files/CD00004438.pdf/jcr:content/translations/en.CD00004438.pdf, Height=1.82mm, Hfe Max=250, Hfe Min=100, Hfe Testic=150mA, Hfe Testvce=2V, Ipc Land Pattern Name=SOT230P700X180-4, Lead Free=Yes, Manufacturer Part Number=BCP56-16, Mouser Description="BCP56 Series 80 V 1 A 1.6 W Surface Mount Low Power NPN Transistor - SOT-223", Number of Elements=1, Number Of Npn=1, Octopart=https://octopart.com/bcp56-16-stmicroelectronics-13883839, RoHS=TRUE, Rthja Max=78°C/W, Standoff Height=0.02mm, Temperature Range High=+150°C
R1 R2 R3 R4 R6 R7 R12 R13 R14 R15 R16 R17 R18 R19 R20 R21 R24 R25 R26 R27 R45: library part CMP-2000-07452-1, "Chip Resistor, 10 KOhm, +/- 1%, 0.1 W, -55 to 155 degC, 0603 (1608 Metric), RoHS, Tape and Reel", Case Code (Imperial)=0603, Case Code (Metric)=1608, Manufacturer=Panasonic, Max Operating Temperature=155degC, Max Power Dissipation=100mW, Min Operating Temperature=-55degC, Package Description="2-Pin Surface Mount Device, Body 1.6 x 0.85 mm", Package Quantity=1, Package Reference=603, Resistance=10KOhm, Temperature Coefficient=100ppm\/degreesC, Tolerance=1%, Voltage Rating=75V, Case\/Package=0603, Composition=ThickFilm, Contact Plating=Tin, Datasheet URL=https://industrial.panasonic.com/cdbs/www-data/pdf/RDA0000/AOA0000C304.pdf, Datasheet Version=02/2017, Depth=0.8mm, Height=0.45mm, Lead Free=LeadFree, Length=1.6mm, Manufacturer URL=http://www.panasonic.com/, Military Standard=Not, Mount=SurfaceMount, Mounting Technology=SurfaceMount, Number of Pins=2, Number of Terminations=2, Packaging=TapeandReel, Power Rating=100mW, Radiation Hardening=No, REACH SVHC=NoSVHC, RoHSCompliant=true, Termination=SMD/SMT, Voltage Rating (DC)=75V, Width=0.031inch
R5 R44: library part Res3, "Resistor", LatestRevisionDate=29-May-2009, LatestRevisionNote="IPC-7351 Footprint Added.", PackageDescription="Chip Resistor", PackageReference=J1-0603, Published=8-Jun-2000, Publisher="Altium Limited"
R8 R9 R10 R11 R43: library part CMP-2000-00896-1, Manufacturer=Panasonic, Part Number=ERA-3AEB121V
R22 R23: library part CMP-2000-02561-1, Manufacturer=Susumu, Part Number=RR0816P-242-D
SW1 SW2: library part CMP-2000-07501-1, "FSMSM Push Button Switch, 50 mA, -35 to 85 degC, 2-Pin SMD, RoHS, Tape and Reel", Case\/Package=SMD/SMT, Contact Current Rating=50mA, Contact Resistance=100mOhm, Manufacturer="TE Connectivity", Max Operating Temperature=85degC, Max Voltage Rating (DC)=12V, Min Operating Temperature=-35degC, Operating Force=180gf, Package Description="2-Pin Surface Mount Device, Body 6 x 3.5 mm, Pitch 9.19 mm", Package Quantity=1800, Package Reference=FSMSMTR, Voltage Rating (DC)=24V, Actuator Length=1.07mm, Actuator Material=Polyamide, Contact Material=Brass, Contact Plating=Silver, Current Rating=50mA, Datasheet URL=http://www.te.com/commerce/DocumentDelivery/DDEController?Action=showdoc&DocId=Customer+Drawing%7F1437566-3%7FC2%7Fpdf%7FEnglish%7FENG_CD_1437566-3_C2_1437566_3_1_c.dwg.pdf%7F1437566-4, Datasheet Version="Rev. C2, 08/2014", Electrical Life=20000Cycles, ELV=Compliant, Illumination Type=Illuminated, Lead Free=LeadFree, Manufacturer URL=http://www.te.com/, Mechanical Life=20000Cycles, Mount=SurfaceMount, Mounting Technology=SurfaceMount, Orientation=Straight, Packaging=TapeandReel, REACH SVHC=Unknown, RoHSCompliant=true, Switch Travel=0.25mm, Termination=GullWing, Throw Configuration=SPST
U1 U2 U3 U8: library part CMP-0244-00208-1, "Positive Voltage Regulator, 3-Pin D2PAK, Tape and Reel", ComponentLink1Description="Manufacturer URL", ComponentLink1URL=http://www.st.com, ComponentLink2Description=Datasheet, ComponentLink2URL=http://www.st.com/internet/com/TECHNICAL_RESOURCES/TECHNICAL_LITERATURE/DATASHEET/CD00000444.pdf, DatasheetVersion=16/11/2011, PackageDescription="3-Pin Transistor Outline Package 2.54 mm Pitch, 15.4 mm Lead Span (D2PAK)", PackageReference=TO-263, PackageVersion=2011
U4: library part CMP-0136-00504-1, "1000 mA, Low Voltage, Low Quiescent Current LDO Regulator, 3-Pin SOT-223, Extended Temperature", DatasheetVersion="revA, Aug-2007", PackageDescription="3-Lead Plastic Small Outline Transistor (DB) [SOT-223]", PackageReference=SOT-223-DB3, PackageVersion="revBB, Aug-2009"
U5: library part CMP-2000-07570-1, "USBXpress(TM) Family, 4 GPIOs, 2.2 to 3.6 V, -40 to 85 degC, 24-Pin QFN, RoHS", Case\/Package=QFN, Manufacturer="Silicon Labs", Max Operating Temperature=85degC, Max Supply Voltage=3.6V, Min Operating Temperature=-40degC, Min Supply Voltage=3V, Package Description="24-Pin Quad Flat No-lead Package, Body 4 x 4 mm, Pitch 0.5 mm", Package Reference=QFN-24-2550x2550TP_A, Datasheet URL=http://www.silabs.com/documents/public/data-sheets/cp2102n-datasheet.pdf, Datasheet Version="Rev. 1.1, 08/2016", Manufacturer URL=http://www.silabs.com/, Mounting Technology=SurfaceMount, Number of Pins=24, REACH SVHC=Unknown, RoHSCompliant=False
U7: library part CMP-1595-00004-2, "16-Channel, 12-Bit PWM Fm+ I2C-Bus LED Controller, 2.3 to 5.5 V, -40 to 85 degC, 28-Pin TSSOP (SOT361-1), RoHS, Tape and Reel", Frequency="25000000 Hz", PartNumber=PCA9685, Supply Current Max="10 mA", Supply Voltage Max="5.5 V", Supply Voltage Min="2.3 V", Temperature Max="85 degC", Temperature Min="-40 degC", Code_JEDEC=MO-153, ComponentLink1Description="Manufacturer URL", ComponentLink1URL=http://www.nxp.com/, ComponentLink2Description=Datasheet, ComponentLink2URL=http://www.nxp.com/documents/data_sheet/PCA9685.pdf, ComponentLink3Description="Package Specification", ComponentLink3URL=http://www.nxp.com/documents/outline_drawing/sot361-1_po.pdf, DatasheetVersion="Rev. 4", Mounting Technology="Surface Mount", PackageDescription="28-Pin Small Outline Package, Body 9.7 x 4.4 mm, Pitch 0.65 mm", PackageVersion=02/2003, Packing="Tape and Reel", RoHS=TRUE
X1: library part CMP-2000-05736-1, "Low Frequency Crystal, 32.768 KHz, -40 to 85 degC, 4-Pin SMD, RoHS, Tape and Reel", Case Height=2.5mm, Case Length=8mm, Case Width=3.8mm, Frequency=32.768kHz, Load Capacitance=12.5pF, Manufacturer=ABRACON, Operating Temperature Range=-40Cto+85C, Package / Case=8mmx3.8mm, Package Description="4-Pin Surface Mount Device, Body 8 x 3.8 mm, Pitch 5.5 mm", Package Reference=ABS25, Tolerance=10PPM, Brand=ABRACON, Datasheet URL=http://www.abracon.com/Resonators/abs25.pdf, Datasheet Version=12/2015, Dimensions=3.8mmWx8mmLx2.5mmH, ESR=50kOhms, Factory Pack Quantity=3000, Manufacturer URL=http://www.abracon.com/, Mounting Style=SMD/SMT, Mounting Technology=SurfaceMount, Packaging=Reel, Product Category=Crystals, RoHS=Details, Series=ABS25, Termination Style=SMD/SMT, Type=LowFrequencyCrystal

## Free pads (board coordinates)
  round 220 hole 100: C1(1365,3530) C2(3380,3530) C3(1365,1130) C4(3380,1130)

## Via types
v1: diameter 22, hole 12, Top Layer to Bottom Layer, 73 vias

## Nets (pads, with @x,y where several pads share a name; then routed paths per layer and width w, separated by ;. In a path a pad name is that pad's centre, name@x,y a point inside that pad or via, vN(x,y) a via of type N, cw(c..) or ccw(c..) an arc to the next point about the centre after c; other vN are vias at no path point)
A0: MD1.37 P8.25 U7.1 | length 1922.5
  Top Layer w8: P8.25@1435,3365 1580,3510 2425,3510 2440,3495 2440,3179.06 2400.94,3140 2410.94,3130 v1(2465,3130) ; v1(2547.38,2799.89) 2547.77,2800.28 U7.1@2594.84,2800.28
  Bottom Layer w8: v1(2465,3130) 2485,3110 2485,3090 2523.03,3051.97 2523.03,2824.23 v1(2547.38,2799.89)
A1: MD1.10 P8.15 U7.2 | length 1521.9
  Top Layer w8: v1(1630,2740) MD1.10@1710,2740 1731.65,2740 1767.65,2704 2177.1,2704 2325.36,2555.74 2325.36,2522.7 2335.78,2512.28 2340.47,2509.47 2355.83,2509.47 2381.3,2484 2398.7,2484 2481.41,2566.71 2481.41,2680.32 2564.13,2763.03 2568.43,2763.03 2576.14,2770.75 U7.2@2594.84,2770.75
  Bottom Layer w8: P8.15@1435,2865 1505,2865 v1(1630,2740)
A2: MD1.11 P8.16 U7.3 | length 1619.6
  Top Layer w8: v1(1592.9,2689.83) 1593.06,2690 MD1.11@1710,2690 2171.3,2690 2311.36,2549.94 2311.36,2516.9 2329.98,2498.28 2336.3,2494.19 2360.49,2470 2404.5,2470 2495.41,2560.91 2495.41,2668.73 2564.13,2737.44 2568.43,2737.44 2576.14,2745.16 U7.3@2594.84,2745.16
  Bottom Layer w8: P8.16@1335,2865 1395.47,2804.53 1478.2,2804.53 v1(1592.9,2689.83)
A3: MD1.12 P8.14 U7.4 | length 1576.1
  Top Layer w8: v1(1625,2640) MD1.12@1710,2640 2201.5,2640 2297.36,2544.14 2297.36,2511.1 2352.46,2456 2410.3,2456 2509.41,2555.12 2509.41,2657.14 2564.13,2711.85 2568.43,2711.85 2576.14,2719.57 U7.4@2594.84,2719.57
  Bottom Layer w8: P8.14@1335,2765 1395.47,2704.53 1482.99,2704.53 1547.51,2640 v1(1625,2640)
A4: MD1.24 P8.2 U7.5 | length 1859.7
  Top Layer w8: P8.2@1335,2165 1335,2152.2 1421.91,2065.3 1753.09,2065.3 1877.28,2189.49 1877.28,2298.9 1967.96,2389.58 2180.25,2389.58 MD1.24@2269.65,2478.98 ; MD1.24@2269.65,2500.63 MD1.24@2269.65,2478.98 ; v1(2535,2610) 2535,2560.9 2416.1,2442 2346.67,2442 2323.41,2465.26 2283.36,2465.26 MD1.24@2269.65,2478.98 ; U7.5@2594.84,2693.98 2613.54,2693.98 2621.26,2701.69 2625.56,2701.69 2647.2,2723.33 2647.2,2727.44 v1(2649.88,2730.12)
  Bottom Layer w8: v1(2535,2610) 2535,2612.62 2649.88,2727.5 v1(2649.88,2730.12)
A5: MD1.26 P8.13 U7.24 | length 1564.9
  Top Layer w8: v1(1790,2735) 1792.53,2735 1807.53,2720 2185,2720 2310.63,2594.37 2353.26,2594.37 2357.64,2590 2452.36,2590 2456.62,2585.74 v1(2460.41,2585.74) ; v1(2755,2695) 2755.51,2694.49 2824.65,2694.49 U7.24@2825.16,2693.98
  Bottom Layer w8: P8.13@1435,2765 1442.31,2765 1538.48,2668.83 1723.83,2668.83 v1(1790,2735) ; v1(2460.41,2585.74) 2645.74,2585.74 v1(2755,2695)
BAT12V: C2.2 C4.2 C6.2 C15.1 C19.2 J5.2 U1.1 U2.1 U3.1 U8.1 | length 3226.6
  Top Layer w20: C19.2@2440,1139.53 2445.59,1139.53 2475.12,1110 U8.1@2550,1110 2558.7,1118.7 2558.7,1203.7 2590,1235 3003.28,1235 3015,1246.72 3015,1513.43 3091.57,1590 3326.57,1590 J5.2@3330,1593.43 ; v1@2845.38,2129.62 v1(2845,2130) 2844.62,2130.38 2809.42,2130.38 2745,2194.8 U3.1@2745,2245 2745.47,2245.47 C6.2@2840,2245.47 2840.24,2245.24 2894.76,2245.24 C2.2@2895,2245 ; C4.2@2915,1664.53 2954.93,1664.53 2959.46,1660 v1(2960,1660)
  Bottom Layer w20: v1(2845,2130) 2845,2129.46 2843.86,2128.32 U1.1@2843.86,2045 ; v1(2960,1660) 2959.62,1659.62 2943.67,1659.62 U2.1@2884.06,1600 ; C15.1@2991.57,1920 2975.98,1935.59 2975.98,1963.07 2894.06,2045 U1.1@2843.86,2045 ; 3294.79,1600 U2.1@2884.06,1600 ; U1.1@2843.86,2045 2745,2045 2705,2005 2705,1615 2720,1600 U2.1@2833.86,1600 U2.1@2884.06,1600
BOOT_OP0: C13.1 MD1.25 Q2.2 R9.2 | length 1948
  Top Layer w8: R9.2@1925.35,2145.04 1925.35,2113.35 1959.95,2078.76 1962.43,2078.76 1973.19,2067.99 C13.1@1973.19,2065.04 2054.96,2065.04 v1(2080,2040) ; Q2.2@2057.05,1269.45 v1@2140,1269.45 ; v1(2140,1275) 2303.46,1275 Q2.2@2309.02,1269.45 ; MD1.25@2379.29,2540 2390,2529.29 v1(2390,2521.63)
  Bottom Layer w8: v1(2140,1275) 2140,1627.5 2080,1687.5 v1(2080,2040) 2169.7,2040 2235,2105.3 2235,2325 2390,2480 v1(2390,2521.63)
CLK: MD1.20 P8.12 | length 1533.8
  Top Layer w8: P8.12@1335,2665 1295.47,2625.47 1295.47,2348.63 1332.57,2311.53 1344.37,2311.53 1381.47,2274.43 1381.47,2242.83 1388.53,2235.77 1388.53,2138.28 1433.5,2093.3 1741.49,2093.3 1849.28,2201.08 1849.28,2310.5 1956.36,2417.58 2008.25,2417.58 2069.65,2478.98 MD1.20@2069.65,2500.63
CMD: MD1.19 P8.10 | length 976.8
  Top Layer w8: v1(1995,2438.58) 1995,2442.37 2005.93,2453.3 2005.93,2486.91 MD1.19@2019.65,2500.63
  Bottom Layer w8: P8.10@1335,2565 1295.47,2525.47 1295.47,2448.63 1339.57,2404.53 1600.19,2404.53 1648.36,2356.35 1912.77,2356.35 v1(1995,2438.58)
D_N: J1.2 U5.4 | length 287.4
  Top Layer w8: J1.2@1419.09,1569.02 1419.18,1568.93 v1(1501.3,1568.93) ; v1(1637.62,1541.48) 1638.64,1542.5 1694.27,1542.5 U5.4@1694.57,1542.8
  Bottom Layer w8: v1(1501.3,1568.93) 1528.74,1541.48 v1(1637.62,1541.48)
D_P: J1.3 R5.2 U5.3 | length 396.1
  Top Layer w8: J1.3@1419.09,1543.43 1506.3,1543.43 ; R5.2@1540.76,1457.71 R5.2@1545.04,1453.43 1545.04,1457.36 1511.3,1491.1 1511.3,1538.43 1506.3,1543.43 ; U5.3@1694.57,1562.48 1693.84,1563.21 1540.76,1563.21 1520.97,1543.43 1506.3,1543.43